# Altium PCB TPS61088RHLR.pcbdoc
Units mil, origin at the board's own origin, x right, y up, seen from the top; angles counter-clockwise.
Board outline 1212 x 1226.6 mil, 2 copper layers (Top Layer, Bottom Layer); 1 components, 0 nets, 21 pads, 0 vias.
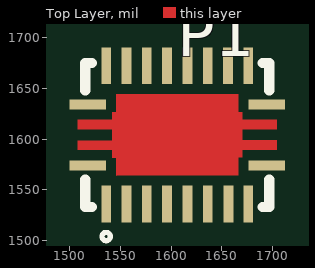
[diagram p0: Top Layer view]
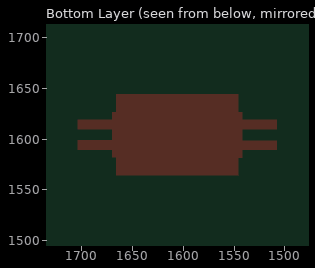
[diagram p1: Bottom Layer view, seen from below]

## Layer stack, top to bottom
Top Layer: signal copper (thickness not stored)
Dielectric: dielectric 12.6, FR-4, Dk 4.8
Bottom Layer: signal copper (thickness not stored)

## Board outline
2212,1000 1000,1000 1000,2226.6 2212,2226.6

## Components (designator, comment, footprint, x,y, rotation, side; value= is the part's Value field where it differs from the comment)
P1 "VQFN-20_L4.6-W3.6-P0.50-BL" VQFN-20_L4.6-W3.6-P0.50-BL 1606,1604.1 r0 top

## Footprints (in the part's own frame and the unit in brackets; to place one, negate y for a bottom-side part, rotate by r counter-clockwise, add the part's x,y. Pads: shape width x height; smd on the part's side, far side on the other; paste and mask are expansions set on the pad)
VQFN-20_L4.6-W3.6-P0.50-BL [mil]
  rect 36x9.6 smd: 1(-88,-30) 10(88,-30) 11(88,30) 20(-88,30)
  rect 9.6x36 smd: 2(-70,-68) 3(-50,-68) 4(-30,-68) 5(-10,-68) 6(10,-68) 7(30,-68) 8(50.4,-68) 9(70,-68) 12(70,68) 13(50,68) 14(30,68) 15(10,68) 16(-10,68) 17(-30,68) 18(-50,68) 19(-70,68)
  round 0 smd: 21(-0.08,0.02)
  Top Layer region: -63.9,5.63 -97.91,5.75 -97.91,14.8 -63.9,14.96 -63.78,22.24 -60,22.28 -59.96,40 60,40 59.88,22.48 63.74,22.48 63.86,15 97.76,15 97.76,5.79 63.74,5.79 63.86,-5.39 97.76,-5.39 97.76,-14.61 63.74,-14.61 63.86,-22.09 60,-22.09 60,-39.92 -60,-40 -60,-22.32 -63.86,-22.32 -63.82,-14.72 -97.76,-14.72 -97.72,-5.63 -63.78,-5.67 -63.82,5.71
  silkscreen extent -91,-104 91,71

## Nets (pads, with @x,y where several pads share a name; then routed paths per layer and width w, separated by ;. In a path a pad name is that pad's centre, name@x,y a point inside that pad or via, vN(x,y) a via of type N, cw(c..) or ccw(c..) an arc to the next point about the centre after c; other vN are vias at no path point)
pads on no net: P1.1 P1.2 P1.3 P1.4 P1.5 P1.6 P1.7 P1.8 P1.9 P1.10 P1.11 P1.12 P1.13 P1.14 P1.15 P1.16 P1.17 P1.18 P1.19 P1.20 P1.21

## Silkscreen, mask and mechanical layers (free items; w line width, h text height)
Document:
  lines w0.1: 1605,1612.3 1607,1614.3